# Altium PCB DUTBoard_Sandbox.PcbDoc (part 4 of 6)
Units mil, origin at the board's own origin, x right, y up, seen from the top; angles counter-clockwise.
Board outline 5475 x 5475 mil, 4 copper layers (Top Layer, Mid-Layer 1, Mid-Layer 2, Bottom Layer); 89 components, 507 nets, 1705 pads, 1204 vias.
Unrouted connection lines stored in the file: 6.
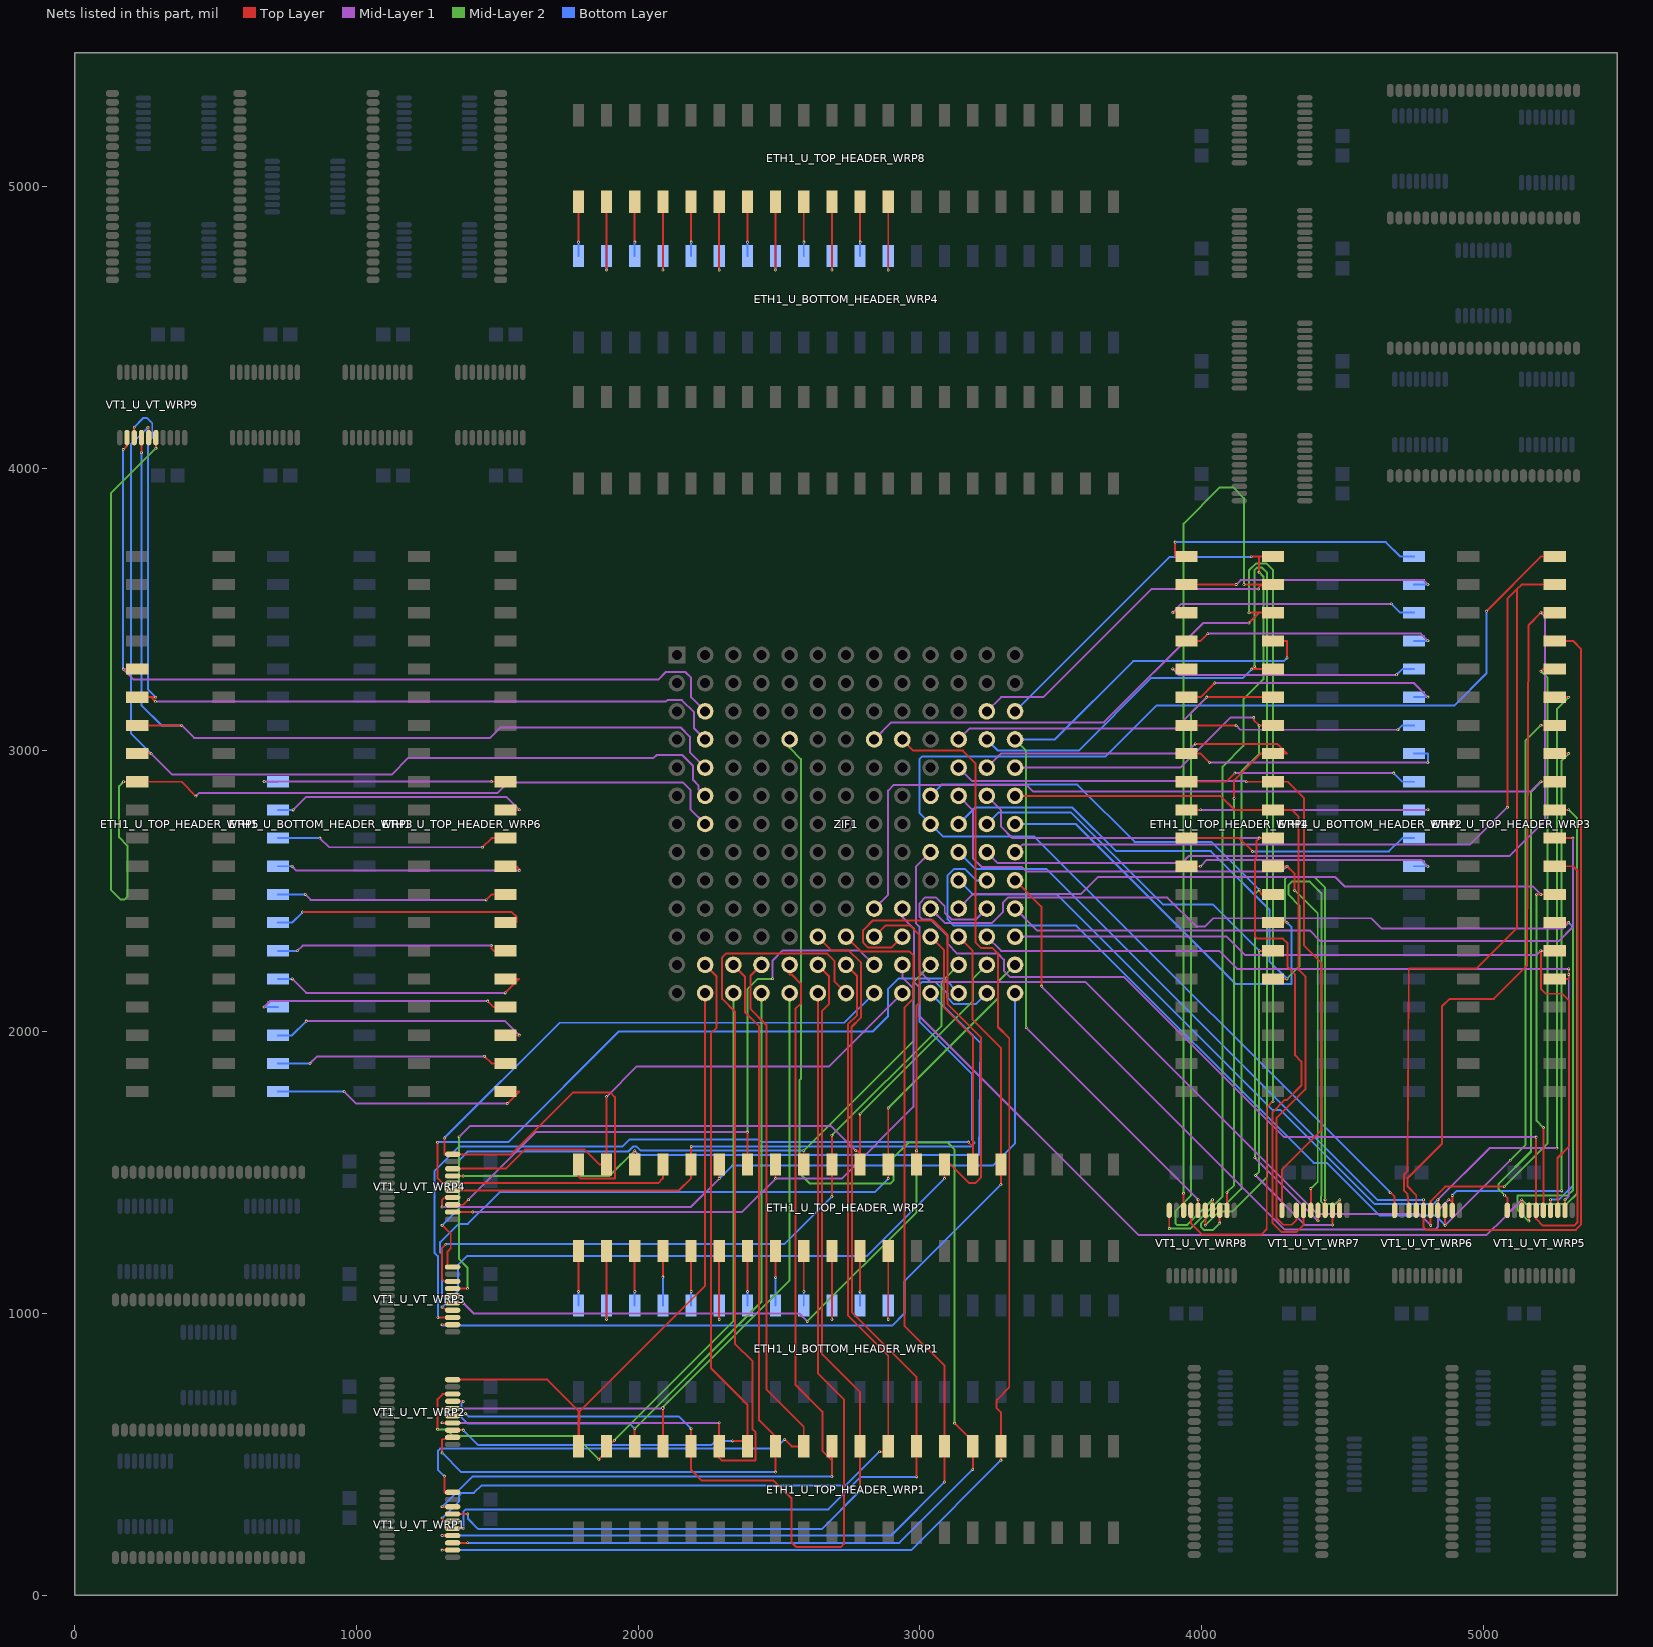
[diagram p6: the nets of this part, all layers, seen from the top]

## Via types
v1: diameter 10, hole 5, Top Layer to Bottom Layer, 1204 vias

## Nets (pads, with @x,y where several pads share a name; then routed paths per layer and width w, separated by ;. In a path a pad name is that pad's centre, name@x,y a point inside that pad or via, vN(x,y) a via of type N, cw(c..) or ccw(c..) an arc to the next point about the centre after c; other vN are vias at no path point) (continued)
INSIDE_B59: ETH1_U_TOP_HEADER_WRP5.29 VT1_U_VT_WRP9.IVCC3 ZIF1.60 | length 4382.2
  Top Layer w7: v1(173,2887.5) ETH1_U_TOP_HEADER_WRP5.29@221.46,2887.5 379,2887.5 v1(430,2836.5) ; VT1_U_VT_WRP9.IVCC3@287.8,4108.86 287.8,4071.2 v1(288,4071)
  Mid-Layer 1 w7: v1(430,2836.5) 440.25,2846.75 1499,2846.75 1537.72,2885.47 2158.53,2885.47 2185.47,2858.53 2185.47,2789.53 ZIF1.60@2237.5,2737.5
  Mid-Layer 2 w7: v1(173,2887.5) 157.5,2872 157.5,2690 187,2660.5 187,2480 177,2470 162,2470 128,2504 128,3911 v1(288,4071)
INSIDE_B60: ETH1_U_TOP_HEADER_WRP5.28 VT1_U_VT_WRP9.IVCC4 ZIF1.61 | length 3423.4
  Top Layer w7: ETH1_U_TOP_HEADER_WRP5.28@221.46,2987.5 v1(270.83,2987.5) ; v1(260,4146) 262.2,4143.8 VT1_U_VT_WRP9.IVCC4@262.2,4108.86
  Mid-Layer 1 w7: v1(270.83,2987.5) 345.33,2913 1125,2913 1184,2972 2055,2972 2065.47,2982.47 2155.53,2982.47 2194.46,2943.54 2194.46,2893.93 2213.78,2874.6 2213.78,2861.22 ZIF1.61@2237.5,2837.5
  Bottom Layer w7: v1(260,4146) 200,4086 200,3058.33 v1(270.83,2987.5)
INSIDE_B61: ETH1_U_TOP_HEADER_WRP5.27 VT1_U_VT_WRP9.IVCC5 ZIF1.62 | length 3263.6
  Top Layer w7: ETH1_U_TOP_HEADER_WRP5.27@221.46,3087.5 v1(379,3087.5) ; v1(236.61,4055) VT1_U_VT_WRP9.IVCC5@236.61,4108.86
  Mid-Layer 1 w7: v1(379,3087.5) 423.5,3043 1474,3043 1511,3080 2151,3080 2183,3048 2183,2992 ZIF1.62@2237.5,2937.5
  Bottom Layer w7: v1(236.61,4055) 236.61,3158.77 307.89,3087.5 v1(379,3087.5)
INSIDE_B62: ETH1_U_TOP_HEADER_WRP5.26 VT1_U_VT_WRP9.IVCC6 ZIF1.63 | length 3244.3
  Top Layer w7: VT1_U_VT_WRP9.IVCC6@211.02,4108.86 v1(211.02,4146) ; ETH1_U_TOP_HEADER_WRP5.26@221.46,3187.5 271,3187.5 ; v1(286.5,3172) 271,3187.5 ; v1(287,3187.5) 271,3187.5
  Mid-Layer 1 w7: v1(286.5,3172) 2098,3172 2103,3177 2155,3177 2198.5,3133.5 2198.5,3076.5 ZIF1.63@2237.5,3037.5
  Bottom Layer w7: v1(211.02,4146) 244.02,4179 256,4179 275,4160 275,4109 260,4094 260,3214.5 v1(287,3187.5)
INSIDE_B63: ETH1_U_TOP_HEADER_WRP5.25 VT1_U_VT_WRP9.IVCC7 ZIF1.64 | length 3067.8
  Top Layer w7: v1(172,3287) v1@172.5,3287.5 ; v1(172,4066.57) 185.43,4080 VT1_U_VT_WRP9.IVCC7@185.43,4108.86 ; v1(172.09,3287.5) v1@172.5,3287.5 ; ETH1_U_TOP_HEADER_WRP5.25@221.46,3287.5 v1@172.5,3287.5
  Mid-Layer 1 w7: v1(172.09,3287.5) 209.59,3250 2071,3250 2098,3277 2167,3277 2188,3256 2188,3187 ZIF1.64@2237.5,3137.5
  Bottom Layer w7: v1(172,3287) v1(172,4066.57)
INSIDE_B64: ETH1_U_TOP_HEADER_WRP4.40 VT1_U_VT_WRP8.IVCC0 ZIF1.65 | length 3782.9
  Top Layer w7: v1(3884.84,1301.5) VT1_U_VT_WRP8.IVCC0@3884.84,1366.14 ; v1(4176,3686) 4177.5,3687.5 4204,3687.5 ; v1(4204,3631) 4204,3687.5 ; ETH1_U_TOP_HEADER_WRP4.40@4253.54,3687.5 4204,3687.5
  Mid-Layer 2 w7: v1(3884.84,1301.5) 3959.5,1301.5 4074,1416 4074,2941 4148,3015 4148,3180 4219,3251 4219,3616 v1(4204,3631)
  Bottom Layer w7: ZIF1.65@3337.5,3137.5 3886,3686 v1(4176,3686)
INSIDE_B65: ETH1_U_TOP_HEADER_WRP4.39 VT1_U_VT_WRP8.IVCC1 ZIF1.66 | length 4295.2
  Top Layer w7: VT1_U_VT_WRP8.IVCC1@3936.02,1366.14 v1(3936.02,1427) ; v1(4150,3587.5) 4213,3587.5 ; v1(4201.5,3571.5) 4201.5,3576 4213,3587.5 ; ETH1_U_TOP_HEADER_WRP4.39@4253.54,3587.5 4213,3587.5
  Mid-Layer 1 w7: ZIF1.66@3237.5,3137.5 3288,3188 3438,3188 3821.5,3571.5 v1(4201.5,3571.5)
  Mid-Layer 2 w7: v1(3936.02,1427) 3936.02,3804.02 4064,3932 4112,3932 4150,3894 v1(4150,3587.5)
INSIDE_B66: ETH1_U_TOP_HEADER_WRP4.38 VT1_U_VT_WRP8.IVCC2 ZIF1.67 | length 4582.5
  Top Layer w7: VT1_U_VT_WRP8.IVCC2@3961.61,1366.14 3961.61,1320 4001.61,1280 4211,1280 4231,1300 4231,1731 v1(4253,1753) ; v1(4167.5,3451) 4204,3487.5 ; v1(4168,3487.5) 4204,3487.5 ; ETH1_U_TOP_HEADER_WRP4.38@4253.54,3487.5 4204,3487.5
  Mid-Layer 1 w7: ZIF1.67@2837.5,3037.5 2898,3098 3653,3098 4006,3451 v1(4167.5,3451)
  Mid-Layer 2 w7: v1(4168,3487.5) 4168,3638 4192,3662 4231,3662 4253,3640 v1(4253,1753)
INSIDE_B67: ETH1_U_TOP_HEADER_WRP4.37 VT1_U_VT_WRP8.IVCC3 ZIF1.68 | length 3135.8
  Top Layer w7: VT1_U_VT_WRP8.IVCC3@3987.2,1366.14 v1(3987.2,1404) ; ETH1_U_TOP_HEADER_WRP4.37@4253.54,3387.5 4303,3387.5 v1(4303,3327)
  Mid-Layer 1 w7: v1(3377,2014.2) v1(3987.2,1404)
  Mid-Layer 2 w7: ZIF1.68@3337.5,3037.5 3377,2998 v1(3377,2014.2)
  Bottom Layer w7: ZIF1.68@3337.5,3037.5 3478.5,3037.5 3757,3316 4292,3316 v1(4303,3327)
INSIDE_B68: ETH1_U_TOP_HEADER_WRP4.36 VT1_U_VT_WRP8.IVCC4 ZIF1.69 | length 4051
  Top Layer w7: v1(4012.8,1313) VT1_U_VT_WRP8.IVCC4@4012.8,1366.14 ; v1(4177.5,3287.5) 4196.5,3287.5 ; v1(4187,3297) 4196.5,3287.5 ; ETH1_U_TOP_HEADER_WRP4.36@4253.54,3287.5 4196.5,3287.5
  Mid-Layer 2 w7: v1(4012.8,1313) 4061.35,1361.55 4107.99,1361.55 4232,1485.57 4232,3629 4213,3648 4197,3648 4187,3638 v1(4187,3297)
  Bottom Layer w7: ZIF1.69@3237.5,3037.5 3277,2998 3563,2998 3820,3255 4145,3255 v1(4177.5,3287.5)
INSIDE_B69: ETH1_U_TOP_HEADER_WRP4.35 VT1_U_VT_WRP8.IVCC5 ZIF1.70 | length 3302.2
  Top Layer w7: v1(4018,3187.5) v1@4018.5,3187.5 ; v1(4018,3188) v1@4018.5,3187.5 ; VT1_U_VT_WRP8.IVCC5@4038.39,1366.14 v1(4038.39,1404) ; ETH1_U_TOP_HEADER_WRP4.35@4253.54,3187.5 v1@4018.5,3187.5
  Mid-Layer 1 w7: ZIF1.70@3137.5,3037.5 3177,3077 3907.5,3077 v1(4018,3187.5)
  Mid-Layer 2 w7: v1(4018,3188) 3962,3132 3962,1418.39 3906.5,1362.89 3906.5,1320 3912,1314.5 3948.89,1314.5 v1(4038.39,1404)
INSIDE_B70: ETH1_U_TOP_HEADER_WRP4.34 VT1_U_VT_WRP8.IVCC6 ZIF1.71 | length 3009.6
  Top Layer w7: v1(4063.98,1321) VT1_U_VT_WRP8.IVCC6@4063.98,1366.14 ; v1(4185,3115) 4185,3106.5 v1(4204,3087.5) ETH1_U_TOP_HEADER_WRP4.34@4253.54,3087.5
  Mid-Layer 1 w7: ZIF1.71@3337.5,2937.5 3924.5,2937.5 4102,3115 v1(4185,3115)
  Mid-Layer 2 w7: v1(4063.98,1321) 4038.98,1296 4008.98,1296 3998.3,1306.68 3998.3,1320 4067.5,1389.2 4088,1389.2 4141,1442.2 4141,2924 4204,2987 v1(4204,3087.5)
INSIDE_B71: ETH1_U_TOP_HEADER_WRP4.33 VT1_U_VT_WRP8.IVCC7 ZIF1.72 | length 2879.2
  Top Layer w7: v1(3977,3022) 4268.41,3022 4302.91,2987.5 ETH1_U_TOP_HEADER_WRP4.33@4253.54,2987.5 4209.37,2987.5 4115,2893.13 v1(4115,2828) ; VT1_U_VT_WRP8.IVCC7@4089.57,1366.14 v1(4089.57,1430)
  Mid-Layer 1 w7: ZIF1.72@3237.5,2937.5 3288,2988 3943,2988 v1(3977,3022)
  Mid-Layer 2 w7: v1(4089.57,1430) 4115,1455.43 v1(4115,2828)
INSIDE_B72: ETH1_U_TOP_HEADER_WRP4.32 VT1_U_VT_WRP7.IVCC0 ZIF1.73 | length 2817.9
  Top Layer w7: v1(4158.5,2887.5) ETH1_U_TOP_HEADER_WRP4.32@4253.54,2887.5 4306,2887.5 4363,2830.5 4363,2307 4425,2245 4425,1650 4284.84,1509.84 VT1_U_VT_WRP7.IVCC0@4284.84,1366.14
  Mid-Layer 1 w7: ZIF1.73@3137.5,2937.5 3185.47,2889.53 4156.47,2889.53 v1(4158.5,2887.5)
INSIDE_B73: ETH1_U_TOP_HEADER_WRP4.31 VT1_U_VT_WRP7.IVCC1 ZIF1.74 | length 2636.9
  Top Layer w7: ZIF1.74@3337.5,2837.5 4066.5,2837.5 4116.5,2787.5 ETH1_U_TOP_HEADER_WRP4.31@4253.54,2787.5 4320,2787.5 4344.5,2763 4344.5,2219.91 4367.87,2196.53 4367.87,1795.79 4265,1692.92 4265,1339 4289,1315 4320,1315 4336.02,1331.02 VT1_U_VT_WRP7.IVCC1@4336.02,1366.14
INSIDE_B74: ETH1_U_TOP_HEADER_WRP4.30 VT1_U_VT_WRP7.IVCC2 ZIF1.75 | length 2838.9
  Top Layer w7: ETH1_U_TOP_HEADER_WRP4.30@4253.54,2687.5 v1(4204.17,2687.5) 4195,2678.33 4195,2619 4189,2613 4189,2339 4197,2331 4288,2331 4305,2314 4305,2230 4332,2203 4332,1916 4354,1894 4354,1809.31 4303,1758.31 4295.31,1758.31 4252,1715 4252,1321 4284,1289 4336,1289 4361.61,1314.61 VT1_U_VT_WRP7.IVCC2@4361.61,1366.14
  Mid-Layer 1 w7: ZIF1.75@3237.5,2837.5 3288,2787 3288,2728 3328.5,2687.5 v1(4204.17,2687.5)
INSIDE_B75: ETH1_U_TOP_HEADER_WRP4.29 VT1_U_VT_WRP7.IVCC3 ZIF1.76 | length 2710.6
  Top Layer w7: ETH1_U_TOP_HEADER_WRP4.29@4253.54,2587.5 v1(4302.91,2587.5) 4330,2560.42 v1(4330,2502) ; VT1_U_VT_WRP7.IVCC3@4387.2,1366.14 v1(4387.2,1443.6)
  Mid-Layer 1 w7: ZIF1.76@3137.5,2837.5 3188,2787 3188,2616 3218.53,2585.47 3360.53,2585.47 3377,2569 4284.41,2569 v1(4302.91,2587.5)
  Mid-Layer 2 w7: v1(4330,2502) 4412,2420 4412,1468.4 v1(4387.2,1443.6)
INSIDE_B76: ETH1_U_TOP_HEADER_WRP4.28 VT1_U_VT_WRP7.IVCC4 ZIF1.77 | length 2707.4
  Top Layer w7: v1(4204.17,2503.5) 4212.67,2487.5 ETH1_U_TOP_HEADER_WRP4.28@4253.54,2487.5 ; v1(4412.8,1329) VT1_U_VT_WRP7.IVCC4@4412.8,1366.14
  Mid-Layer 1 w7: v1(4189,1552.8) v1(4412.8,1329)
  Mid-Layer 2 w7: v1(4189,1552.8) 4189,2488.33 v1(4204.17,2503.5)
  Bottom Layer w7: ZIF1.77@3037.5,2837.5 3077,2877 3559,2877 3762,2674 4033.67,2674 v1(4204.17,2503.5)
INSIDE_B77: ETH1_U_TOP_HEADER_WRP4.27 VT1_U_VT_WRP7.IVCC5 ZIF1.78 | length 2953.6
  Top Layer w7: ETH1_U_TOP_HEADER_WRP4.27@4253.54,2387.5 v1(4302.91,2387.5) ; v1(4438,1404) 4438.39,1403.61 VT1_U_VT_WRP7.IVCC5@4438.39,1366.14
  Mid-Layer 2 w7: v1(4302.91,2387.5) 4295.46,2394.95 4295.46,2541.46 4304,2550 4400,2550 4438,2512 v1(4438,1404)
  Bottom Layer w7: ZIF1.78@3337.5,2737.5 3552.5,2737.5 4120,2170 4318,2170 4318,2372.41 v1(4302.91,2387.5)
INSIDE_B78: ETH1_U_TOP_HEADER_WRP4.26 VT1_U_VT_WRP7.IVCC6 ZIF1.79 | length 2437
  Top Layer w7: v1(4204.17,2287.5) ETH1_U_TOP_HEADER_WRP4.26@4253.54,2287.5 ; v1(4463.98,1314) VT1_U_VT_WRP7.IVCC6@4463.98,1366.14
  Mid-Layer 1 w7: v1(4191,1490) 4367,1314 v1(4463.98,1314)
  Mid-Layer 2 w7: v1(4191,1490) 4204.17,1503.17 v1(4204.17,2287.5)
  Bottom Layer w7: ZIF1.79@3237.5,2737.5 3278,2778 3537,2778 3864,2451 4040.67,2451 v1(4204.17,2287.5)
INSIDE_B79: ETH1_U_TOP_HEADER_WRP4.25 VT1_U_VT_WRP7.IVCC7 ZIF1.80 | length 3315.1
  Top Layer w7: ETH1_U_TOP_HEADER_WRP4.25@4253.54,2187.5 v1(4302.5,2187.5) v1(4302.91,2187.5) ; VT1_U_VT_WRP7.IVCC7@4489.57,1366.14 4489.57,1403.57 v1(4490,1404)
  Mid-Layer 2 w7: v1(4302.5,2187.5) 4347,2232 4347,2448 4308.46,2486.54 4308.46,2521.46 4320,2533 4384,2533 4425,2492 4425,1417 4423,1415 4423,1398 4432,1389 4475,1389 v1(4490,1404)
  Bottom Layer w7: ZIF1.80@3137.5,2737.5 3196,2796 3541,2796 3696,2641 4033,2641 4240,2434 4240,2250.41 v1(4302.91,2187.5)
INSIDE_B80: ETH1_U_TOP_HEADER_WRP3.40 VT1_U_VT_WRP6.IVCC0 ZIF1.81 | length 5173.3
  Top Layer w7: v1(4668.84,1430) 4684.84,1414 VT1_U_VT_WRP6.IVCC0@4684.84,1366.14 ; v1(5011,3493) 5205.5,3687.5 ETH1_U_TOP_HEADER_WRP3.40@5253.54,3687.5
  Bottom Layer w7: v1(4668.84,1430) 3406.34,2692.5 3082.5,2692.5 ZIF1.81@3037.5,2737.5 2998,2777 2998,2968 3007,2977 3658.17,2977 3839.17,3158 4897,3158 5011,3272 v1(5011,3493)
INSIDE_B81: ETH1_U_TOP_HEADER_WRP3.39 VT1_U_VT_WRP6.IVCC1 ZIF1.82 | length 5258
  Top Layer w7: VT1_U_VT_WRP6.IVCC1@4736.02,1366.14 4730,1425 4717.5,1437.5 4717.5,1492.5 4730,1505 4735,2225 4976,2225 5119,2368 5119,3570.5 ; v1(5085,2797) 5085,3536.5 5119,3570.5 ; ETH1_U_TOP_HEADER_WRP3.39@5253.54,3587.5 5136,3587.5 5119,3570.5
  Mid-Layer 1 w7: ZIF1.82@3337.5,2637.5 3365,2665 4953,2665 v1(5085,2797)
INSIDE_B82: ETH1_U_TOP_HEADER_WRP3.38 VT1_U_VT_WRP6.IVCC2 ZIF1.83 | length 5273.4
  Top Layer w7: VT1_U_VT_WRP6.IVCC2@4761.61,1366.14 4761.61,1419.89 4730.5,1451 4730.5,1479.5 4853,1602 4853,2090 4880,2117 5037,2117 5154,2234 5159.99,3443.31 v1(5204.17,3487.5) ETH1_U_TOP_HEADER_WRP3.38@5253.54,3487.5
  Mid-Layer 1 w7: ZIF1.83@3237.5,2637.5 3276.53,2598.47 3929.47,2598.47 3955,2624 5093,2624 5219,2750 5219,3472.67 v1(5204.17,3487.5)
INSIDE_B83: ETH1_U_TOP_HEADER_WRP3.37 VT1_U_VT_WRP6.IVCC3 ZIF1.84 | length 4977
  Top Layer w7: v1(4787.2,1403.7) VT1_U_VT_WRP6.IVCC3@4787.2,1366.14 4787.2,1306.98 4796.99,1297.19 5328,1297.19 5347.01,1316.2 5347.01,3358.49 5318,3387.5 ETH1_U_TOP_HEADER_WRP3.37@5253.54,3387.5
  Bottom Layer w7: ZIF1.84@3137.5,2637.5 3198,2577 3450,2577 4623.3,1403.7 v1(4787.2,1403.7)
INSIDE_B84: ETH1_U_TOP_HEADER_WRP3.36 VT1_U_VT_WRP6.IVCC4 ZIF1.85 | length 4962.2
  Top Layer w7: v1(4812.8,1312.58) VT1_U_VT_WRP6.IVCC4@4812.8,1366.14 4812.8,1398.8 4864,1450 v1(5074,1450) ; v1(5204,3280) 5211.5,3287.5 ETH1_U_TOP_HEADER_WRP3.36@5253.54,3287.5
  Mid-Layer 1 w7: ZIF1.85@3037.5,2637.5 2985.47,2585.47 2985.47,2385.47 2998,2372.94 2998,2216 3037,2177 3587,2177 4410,1354 4771.38,1354 v1(4812.8,1312.58)
  Mid-Layer 2 w7: v1(5074,1450) 5228,1604 5228,3256 v1(5204,3280)
INSIDE_B85: ETH1_U_TOP_HEADER_WRP3.35 VT1_U_VT_WRP6.IVCC5 ZIF1.86 | length 4386.2
  Top Layer w7: VT1_U_VT_WRP6.IVCC5@4838.39,1366.14 v1(4838.39,1403.7) ; ETH1_U_TOP_HEADER_WRP3.35@5253.54,3187.5 v1(5303,3187.5)
  Mid-Layer 1 w7: v1(4838.39,1403.7) 5021.69,1587 v1(5261,1587)
  Mid-Layer 2 w7: v1(5261,1587) 5261,3145.5 v1(5303,3187.5)
  Bottom Layer w7: ZIF1.86@3137.5,2537.5 3187,2488 3485.27,2488 4251.68,1721.59 4280.41,1721.59 4613,1389 4823.69,1389 v1(4838.39,1403.7)
INSIDE_B86: ETH1_U_TOP_HEADER_WRP3.34 VT1_U_VT_WRP6.IVCC6 ZIF1.87 | length 4555.5
  Top Layer w7: v1(4864,1313) VT1_U_VT_WRP6.IVCC6@4863.98,1366.14 ; v1(5204,3088) 5204.5,3087.5 ETH1_U_TOP_HEADER_WRP3.34@5253.54,3087.5
  Mid-Layer 1 w7: v1(4864,1313) v1(5095,1544)
  Mid-Layer 2 w7: v1(5095,1544) 5149,1598 5149,3033 v1(5204,3088)
  Bottom Layer w7: ZIF1.87@3237.5,2537.5 3199.5,2537.5 3160,2577 3120,2577 3098,2555 3098,2399 3120,2377 3555,2377 4397,1535 4444,1535 4631,1348 4829,1348 v1(4864,1313)
INSIDE_B87: ETH1_U_TOP_HEADER_WRP3.33 VT1_U_VT_WRP6.IVCC7 ZIF1.88 | length 4372.7
  Top Layer w7: ZIF1.88@3337.5,2537.5 3431,2444 v1(3431,2162) ; v1(4877,1404) 4880,1404 4889.57,1394.43 ; VT1_U_VT_WRP6.IVCC7@4889.57,1366.14 4889.57,1394.43 ; v1(4889.57,1419) 4889.57,1394.43 ; ETH1_U_TOP_HEADER_WRP3.33@5253.54,2987.5 v1(5303,2987.5)
  Mid-Layer 1 w7: v1(3431,2162) 4295,1298 4828.91,1298 4838,1307.09 4838,1365 v1(4877,1404)
  Mid-Layer 2 w7: v1(5278,1435) 5278,2962.5 v1(5303,2987.5)
  Bottom Layer w7: v1(4889.57,1419) 4905.57,1435 v1(5278,1435)
INSIDE_B88: ETH1_U_TOP_HEADER_WRP3.32 VT1_U_VT_WRP5.IVCC0 ZIF1.89 | length 4434.1
  Top Layer w7: v1(5075,1420) 5084.84,1410.16 VT1_U_VT_WRP5.IVCC0@5084.84,1366.14 ; v1(5204.17,2887.5) ETH1_U_TOP_HEADER_WRP3.32@5253.54,2887.5
  Mid-Layer 1 w7: ZIF1.89@2837.5,2437.5 2887,2487 2887,2856 2907.53,2876.53 3377,2876.53 3400.53,2853 5169.67,2853 v1(5204.17,2887.5)
  Mid-Layer 2 w7: v1(5075,1420) 5054.4,1440.6 5054.4,1460.4 5169,1575 5169,2852.33 v1(5204.17,2887.5)
INSIDE_B89: ETH1_U_TOP_HEADER_WRP3.31 VT1_U_VT_WRP5.IVCC1 ZIF1.90 | length 4598.1
  Top Layer w7: VT1_U_VT_WRP5.IVCC1@5136.02,1366.14 v1(5136.02,1403.7) ; ETH1_U_TOP_HEADER_WRP3.31@5253.54,2787.5 5302.5,2787.5 v1(5303,2788)
  Mid-Layer 1 w7: ZIF1.90@2937.5,2437.5 2937.5,2407.44 2978.58,2366.37 2978.58,2177.86 2998,2158.44 2998,2056 3775,1279 5011.32,1279 5072,1338.01 5096.18,1363.86 v1(5136.02,1403.7)
  Mid-Layer 2 w7: v1(5136.02,1403.7) 5150.73,1389 5296,1389 5333,1426 5333,2758 v1(5303,2788)
INSIDE_B90: ETH1_U_TOP_HEADER_WRP3.30 VT1_U_VT_WRP5.IVCC2 ZIF1.91 | length 4029.3
  Top Layer w7: v1(5161.61,1328) VT1_U_VT_WRP5.IVCC2@5161.61,1366.14 ; ETH1_U_TOP_HEADER_WRP3.30@5253.54,2687.5 v1(5318,2687.5)
  Mid-Layer 1 w7: ZIF1.91@3337.5,2437.5 3415,2360 4383,2360 4421,2322 5268,2322 5318,2372 v1(5318,2687.5)
  Mid-Layer 2 w7: v1(5161.61,1328) 5121,1368.61 5121,1419 5299,1419 5318,1438 v1(5318,2687.5)
INSIDE_B91: ETH1_U_TOP_HEADER_WRP3.29 VT1_U_VT_WRP5.IVCC3 ZIF1.92 | length 4695.6
  Top Layer w7: v1(5187.2,1626) VT1_U_VT_WRP5.IVCC3@5187.2,1366.14 5187.2,1336 5211.2,1312 5321.66,1312 5334.01,1324.35 5334.01,2572.49 5319,2587.5 ETH1_U_TOP_HEADER_WRP3.29@5253.54,2587.5
  Mid-Layer 1 w7: ZIF1.92@3237.5,2437.5 3198.47,2398.47 3112.53,2398.47 3088,2423 3088,2445 3056,2477 3019.47,2477 2998.47,2456 2998.47,2408 3008,2398.47 3038,2398.47 3098,2338.47 3098,2312 3133,2277 3277,2277 3298,2256 3298,2216 3319,2195 3724,2195 4293,1626 v1(5187.2,1626)
INSIDE_B92: ETH1_U_TOP_HEADER_WRP3.28 VT1_U_VT_WRP5.IVCC4 ZIF1.93 | length 3334.7
  Top Layer w7: v1(5189,2487.5) v1(5204.17,2487.5) ETH1_U_TOP_HEADER_WRP3.28@5253.54,2487.5 ; VT1_U_VT_WRP5.IVCC4@5212.8,1366.14 v1(5212.8,1660)
  Mid-Layer 1 w7: ZIF1.93@3137.5,2437.5 3189.53,2489.53 3572.53,2489.53 3632.75,2549.75 4473.25,2549.75 4507,2516 5175.67,2516 v1(5204.17,2487.5)
  Mid-Layer 2 w7: v1(5189,2487.5) 5189,1683.8 v1(5212.8,1660)
INSIDE_B93: ETH1_U_TOP_HEADER_WRP3.27 VT1_U_VT_WRP5.IVCC5 ZIF1.94 | length 3551.7
  Top Layer w7: v1(5238,1404) 5238.39,1403.61 VT1_U_VT_WRP5.IVCC5@5238.39,1366.14 ; ETH1_U_TOP_HEADER_WRP3.27@5253.54,2387.5 v1(5302.91,2387.5)
  Mid-Layer 1 w7: ZIF1.94@3037.5,2437.5 3089.53,2385.47 3254.47,2385.47 3295.24,2426.24 3295.24,2459.77 3312,2476.53 3878.47,2476.53 3982,2373 4011,2373 4041,2403 4602,2403 4639,2366 5281.41,2366 v1(5302.91,2387.5)
  Bottom Layer w7: v1(5238,1404) 5268,1404 5318,1454 5318,2372.41 v1(5302.91,2387.5)
INSIDE_B94: ETH1_U_TOP_HEADER_WRP3.26 VT1_U_VT_WRP5.IVCC6 ZIF1.95 | length 2962.8
  Top Layer w7: ETH1_U_TOP_HEADER_WRP3.26@5253.54,2287.5 v1(5204.17,2287.5) 5204,2287.5 5204,2152 5221,2135 5280,2135 5303,2112 5303,1592 5263,1552 5263,1405.98 5263.98,1405 VT1_U_VT_WRP5.IVCC6@5263.98,1366.14
  Mid-Layer 1 w7: ZIF1.95@3337.5,2337.5 4088.5,2337.5 4153,2273 5189.67,2273 v1(5204.17,2287.5)
INSIDE_B95: ETH1_U_TOP_HEADER_WRP3.25 VT1_U_VT_WRP5.IVCC7 ZIF1.96 | length 3040.6
  Top Layer w7: ETH1_U_TOP_HEADER_WRP3.25@5253.54,2187.5 5302.91,2187.5 v1(5302.91,2203.5) v1(5302.91,2223) ; VT1_U_VT_WRP5.IVCC7@5289.57,1366.14 v1(5289.57,1403.57)
  Mid-Layer 1 w7: ZIF1.96@3237.5,2337.5 3288,2287 4062,2287 4126,2223 v1(5302.91,2223) ; v1(5289.57,1403.57) 5302.91,1416.91 v1(5302.91,2203.5)
INSIDE_B96: ETH1_U_TOP_HEADER_WRP2.40 VT1_U_VT_WRP4.IVCC0 ZIF1.97 | length 2962.3
  Top Layer w7: v1(1312,1623) 1312,1565.16 VT1_U_VT_WRP4.IVCC0@1341.14,1565.16 1550,1565.16 1769.84,1785 1900,1785 1917,1768 1917,1479 1796.5,1479 1787.5,1488 ETH1_U_TOP_HEADER_WRP2.40@1787.5,1528.54
  Bottom Layer w7: v1(1312,1623) 1721,2032 2732,2032 ZIF1.97@2837.5,2137.5
INSIDE_B97: ETH1_U_TOP_HEADER_WRP2.39 VT1_U_VT_WRP4.IVCC1 ZIF1.98 | length 2040.4
  Top Layer w7: VT1_U_VT_WRP4.IVCC1@1341.14,1513.98 1530,1513.98 1598.02,1582 1810,1582 1863.46,1528.54 ETH1_U_TOP_HEADER_WRP2.39@1887.5,1528.54 v1(1887.5,1770)
  Mid-Layer 1 w7: v1(1887.5,1770) 1993.5,1876 2676,1876 ZIF1.98@2937.5,2137.5
INSIDE_B98: ETH1_U_TOP_HEADER_WRP2.38 VT1_U_VT_WRP4.IVCC2 ZIF1.99 | length 2611.3
  Top Layer w7: VT1_U_VT_WRP4.IVCC2@1341.14,1488.39 1378.61,1488.39 v1(1379,1488) ; ETH1_U_TOP_HEADER_WRP2.38@1987.5,1528.54 v1(1987.5,1577.91)
  Mid-Layer 2 w7: v1(1379,1488) 1897.59,1488 v1(1987.5,1577.91)
  Bottom Layer w7: v1(1987.5,1577.91) 2003.41,1562 3210,1562 3215,1960 ZIF1.99@3037.5,2137.5
INSIDE_B99: ETH1_U_TOP_HEADER_WRP2.37 VT1_U_VT_WRP4.IVCC3 ZIF1.100 | length 3158.5
  Top Layer w7: v1(1288,1608) 1288,1480 1305.2,1462.8 VT1_U_VT_WRP4.IVCC3@1341.14,1462.8 2070.3,1462.8 2087.5,1480 ETH1_U_TOP_HEADER_WRP2.37@2087.5,1528.54
  Bottom Layer w7: v1(1288,1608) 1538,1608 1931,2001 2832,2001 2887,2056 2887,2152 2924.53,2189.53 3085.47,2189.53 ZIF1.100@3137.5,2137.5
INSIDE_B100: ETH1_U_TOP_HEADER_WRP2.36 VT1_U_VT_WRP4.IVCC4 ZIF1.101 | length 2932.3
  Top Layer w7: VT1_U_VT_WRP4.IVCC4@1341.14,1437.2 2144.7,1437.2 2187.5,1480 ETH1_U_TOP_HEADER_WRP2.36@2187.5,1528.54 2187.5,1592.5 v1(2188,1593)
  Bottom Layer w7: v1(2188,1593) 3181.5,1593 3194.5,1606 3185,1615.5 3185,1849 2998.47,2035.53 2998.47,2168 3007,2176.53 3056,2176.53 3098,2134.53 3098,2120 3120,2098 3198,2098 ZIF1.101@3237.5,2137.5
INSIDE_B101: ETH1_U_TOP_HEADER_WRP2.35 VT1_U_VT_WRP4.IVCC5 ZIF1.102 | length 2776.4
  Top Layer w7: v1(1304,1378) 1304,1403.61 1312,1411.61 VT1_U_VT_WRP4.IVCC5@1341.14,1411.61 ; v1(2287.5,1479) v1(2287.5,1479.17) ETH1_U_TOP_HEADER_WRP2.35@2287.5,1528.54
  Mid-Layer 1 w7: v1(1304,1378) 2186.5,1378 v1(2287.5,1479)
  Bottom Layer w7: v1(2287.5,1479.17) 2333.33,1525 3259,1525 3337.5,1603.5 ZIF1.102@3337.5,2137.5
INSIDE_B102: ETH1_U_TOP_HEADER_WRP2.34 VT1_U_VT_WRP4.IVCC6 ZIF1.103 | length 2341.7
  Top Layer w7: VT1_U_VT_WRP4.IVCC6@1341.14,1386.02 1379.02,1386.02 v1(1397,1404) ; ETH1_U_TOP_HEADER_WRP2.34@2387.5,1528.54 v1(2387.5,1644)
  Mid-Layer 1 w7: v1(1397,1404) 1637,1644 v1(2387.5,1644) ; v1(2477,2188) 2477,2253 2512,2288 2787,2288 ZIF1.103@2837.5,2237.5
  Mid-Layer 2 w7: v1(2387.5,1644) 2387.5,2151.5 2424,2188 v1(2477,2188)
INSIDE_B103: ETH1_U_TOP_HEADER_WRP2.33 VT1_U_VT_WRP4.IVCC7 ZIF1.104 | length 2359.6
  Top Layer w7: VT1_U_VT_WRP4.IVCC7@1341.14,1360.43 v1(1412.91,1360.43) ; v1(2487.5,1479) ETH1_U_TOP_HEADER_WRP2.33@2487.5,1528.54
  Mid-Layer 1 w7: v1(1412.91,1360.43) 2368.93,1360.43 v1(2487.5,1479) 2722,1479 2976.53,1733.53 2976.53,2154.05 2937.5,2193.08 ZIF1.104@2937.5,2237.5
INSIDE_B104: ETH1_U_TOP_HEADER_WRP2.32 VT1_U_VT_WRP3.IVCC0 ZIF1.105 | length 2584.1
  Top Layer w7: v1(1304,1313) 1334.5,1282.5 1334.5,1231.5 1323,1220 1323,1165.16 VT1_U_VT_WRP3.IVCC0@1341.14,1165.16 ; ETH1_U_TOP_HEADER_WRP2.32@2587.5,1528.54 v1(2587.5,1578)
  Mid-Layer 2 w7: v1(2587.5,1578) 2977.59,1968.09 2977.59,2177.59 ZIF1.105@3037.5,2237.5
  Bottom Layer w7: v1(1304,1313) 1364,1373 1364,1544 1395,1575 1964,1575 1981.42,1592.42 1994.58,1592.42 2009,1578 v1(2587.5,1578)
INSIDE_B105: ETH1_U_TOP_HEADER_WRP2.31 VT1_U_VT_WRP3.IVCC1 ZIF1.106 | length 2619.3
  Top Layer w7: v1(1317,1246) 1304,1233 1304,1121.98 1312,1113.98 VT1_U_VT_WRP3.IVCC1@1341.14,1113.98 ; v1(2687.5,1415) ETH1_U_TOP_HEADER_WRP2.31@2687.5,1528.54 v1(2687.5,1632.5)
  Mid-Layer 2 w7: v1(2687.5,1632.5) 3077,2022 3077,2177 ZIF1.106@3137.5,2237.5
  Bottom Layer w7: v1(1317,1246) 2518.5,1246 v1(2687.5,1415)
INSIDE_B106: ETH1_U_TOP_HEADER_WRP2.30 VT1_U_VT_WRP3.IVCC2 ZIF1.107 | length 2978.7
  Top Layer w7: VT1_U_VT_WRP3.IVCC2@1341.14,1088.39 v1(1394,1088.39) ; v1(2772,1578) 2777.5,1578 2787.5,1568 ; ETH1_U_TOP_HEADER_WRP2.30@2787.5,1528.54 2787.5,1568 ; v1(2787.5,1708.5) 2787.5,1568
  Mid-Layer 1 w7: v1(1364,1627) 1402,1665 2685,1665 v1(2772,1578)
  Mid-Layer 2 w7: v1(1364,1627) 1364,1193 1394,1163 v1(1394,1088.39) ; v1(2787.5,1708.5) 3188,2109 3188,2188 ZIF1.107@3237.5,2237.5
INSIDE_B107: ETH1_U_TOP_HEADER_WRP2.29 VT1_U_VT_WRP3.IVCC3 ZIF1.108 | length 2859
  Top Layer w7: v1(1304.2,1063) 1304.41,1062.8 VT1_U_VT_WRP3.IVCC3@1341.14,1062.8 ; v1(2887.5,1479) ETH1_U_TOP_HEADER_WRP2.29@2887.5,1528.54 v1(2887.5,1729.5)
  Mid-Layer 2 w7: v1(2887.5,1729.5) 3277,2119 3277,2177 ZIF1.108@3337.5,2237.5
  Bottom Layer w7: v1(1304.2,1063) 1304.2,1209.8 1297,1217 1297,1253 1362.23,1318.23 1395.31,1318.23 1508.08,1431 2839.5,1431 v1(2887.5,1479)
INSIDE_B108: ETH1_U_TOP_HEADER_WRP2.28 VT1_U_VT_WRP3.IVCC4 ZIF1.109 | length 3063.6
  Top Layer w7: VT1_U_VT_WRP3.IVCC4@1341.14,1037.2 v1(1379,1037.2) ; ZIF1.109@2837.5,2337.5 2877,2377 2965,2377 2998,2344 2998,2103 2987.5,2092.5 v1@2987.5,1577.5 ; ETH1_U_TOP_HEADER_WRP2.28@2987.5,1528.54 v1@2987.5,1577.5 ; v1(2988,1578) v1@2987.5,1577.5
  Mid-Layer 1 w7: v1(1379,1037.2) 1416.2,1000 2572,1000 v1(2600,972)
  Mid-Layer 2 w7: v1(2600,972) 2988,1360 v1(2988,1578)
INSIDE_B109: ETH1_U_TOP_HEADER_WRP2.27 VT1_U_VT_WRP3.IVCC5 ZIF1.110 | length 3734.4
  Top Layer w7: v1(1304,1023) 1304,1019.61 VT1_U_VT_WRP3.IVCC5@1341.14,1011.61 ; ZIF1.110@2937.5,2337.5 2898.47,2298.47 2816,2298.47 2798,2316.47 2798,2361 2832,2395 3047,2395 3098.47,2343.53 3098.47,2098 3217,1979.47 3217,1483 3198,1464 3174,1464 3109.46,1528.54 ETH1_U_TOP_HEADER_WRP2.27@3087.5,1528.54 3087.5,1479.5 v1(3087,1479)
  Bottom Layer w7: v1(1304,1023) 1360,1079 1360,1171.49 1392,1203.49 2811.49,1203.49 v1(3087,1479)
INSIDE_B110: ETH1_U_TOP_HEADER_WRP2.26 VT1_U_VT_WRP3.IVCC6 ZIF1.111 | length 3415.7
  Top Layer w7: v1(1289,986.02) VT1_U_VT_WRP3.IVCC6@1341.14,986.02 ; ZIF1.111@3037.5,2337.5 3085.47,2289.53 3085.47,2085.47 3187.5,1983.44 3187.5,1593 ; v1(3172.08,1608.42) 3187.5,1593 ; ETH1_U_TOP_HEADER_WRP2.26@3187.5,1528.54 3187.5,1593
  Bottom Layer w7: v1(1289,986.02) 1289,1204 1276.5,1216.5 1276.5,1504.63 1364.87,1593 1944.48,1593 1969.89,1618.42 2428,1618.42 2438,1608.42 v1(3172.08,1608.42)
INSIDE_B111: ETH1_U_TOP_HEADER_WRP2.25 VT1_U_VT_WRP3.IVCC7 ZIF1.112 | length 3238.9
  Top Layer w7: v1(1304,960) 1304.43,960.43 VT1_U_VT_WRP3.IVCC7@1341.14,960.43 ; ZIF1.112@3137.5,2337.5 3187,2288 3187,2043 3287.5,1942.5 ETH1_U_TOP_HEADER_WRP2.25@3287.5,1528.54 v1(3287.5,1457.5)
  Bottom Layer w7: v1(1304,960) 1307,957 2902,957 2945,1000 2945,1115 v1(3287.5,1457.5)
INSIDE_B112: ETH1_U_TOP_HEADER_WRP1.40 VT1_U_VT_WRP2.IVCC0 ZIF1.113 | length 2415.3
  Top Layer w7: VT1_U_VT_WRP2.IVCC0@1341.14,765.16 1677.34,765.16 1791,651.5 ; ZIF1.113@2237.5,2137.5 2237.5,1098 1791,651.5 ; 1791,651.5 1787.5,648 ETH1_U_TOP_HEADER_WRP1.40@1787.5,528.54 1791,651.5
INSIDE_B113: ETH1_U_TOP_HEADER_WRP1.39 VT1_U_VT_WRP2.IVCC1 ZIF1.114 | length 2642
  Top Layer w7: v1(1288,589) 1288,696 1305.98,713.98 VT1_U_VT_WRP2.IVCC1@1341.14,713.98 ; v1(1860.5,482) 1887.5,509 ETH1_U_TOP_HEADER_WRP1.39@1887.5,528.54 1894.04,528.54 v1(1915.5,550)
  Mid-Layer 2 w7: v1(1288,589) 1318,589 1341,566 1776.5,566 v1(1860.5,482) ; v1(1915.5,550) 2338,972.5 2338,2137.5 ZIF1.114@2337.5,2137.5
INSIDE_B114: ETH1_U_TOP_HEADER_WRP1.38 VT1_U_VT_WRP2.IVCC2 ZIF1.115 | length 2524.8
  Top Layer w7: VT1_U_VT_WRP2.IVCC2@1341.14,688.39 1378.61,688.39 v1(1379,688) ; ETH1_U_TOP_HEADER_WRP1.38@1987.5,528.54 v1(1987.5,591)
  Mid-Layer 2 w7: v1(1987.5,591) 2437.5,1041 ZIF1.115@2437.5,2137.5
  Bottom Layer w7: v1(1379,688) 1372,681 1372,632 1395,609 1969.5,609 v1(1987.5,591)
INSIDE_B115: ETH1_U_TOP_HEADER_WRP1.37 VT1_U_VT_WRP2.IVCC3 ZIF1.116 | length 2615.6
  Top Layer w7: v1(1304.2,662.8) VT1_U_VT_WRP2.IVCC3@1341.14,662.8 ; ETH1_U_TOP_HEADER_WRP1.37@2087.5,528.54 v1(2087.5,662.8) v1(2087.5,667.5)
  Mid-Layer 1 w7: v1(1304.2,662.8) v1(2087.5,662.8)
  Mid-Layer 2 w7: v1(2087.5,667.5) 2537.5,1117.5 ZIF1.116@2537.5,2137.5
INSIDE_B116: ETH1_U_TOP_HEADER_WRP1.36 VT1_U_VT_WRP2.IVCC4 ZIF1.117 | length 3763.3
  Top Layer w7: VT1_U_VT_WRP2.IVCC4@1341.14,637.2 1379,637.2 v1(1386.9,645.1) ; v1(2187.5,591) ETH1_U_TOP_HEADER_WRP1.36@2187.5,528.54 2187.5,444.5 2224,408 2480,408 2544,344 2544,188 2560,172 2720,172 2730,182 2730,695 2637.5,787.5 ZIF1.117@2637.5,2137.5
  Bottom Layer w7: v1(1386.9,645.1) 1397,635 2143.5,635 v1(2187.5,591)
INSIDE_B117: ETH1_U_TOP_HEADER_WRP1.35 VT1_U_VT_WRP2.IVCC5 ZIF1.118 | length 3658
  Top Layer w7: v1(1304,612) 1304.39,611.61 VT1_U_VT_WRP2.IVCC5@1341.14,611.61 ; v1(2287.5,612) ETH1_U_TOP_HEADER_WRP1.35@2287.5,528.54 2287.5,487.5 2296,479 2417,479 2417,578 2406,589 2406,830 2343,893 2343,2072 2298,2117 2298,2264 2311,2277 2671,2277 2696,2252 2696,2179 ZIF1.118@2737.5,2137.5
  Mid-Layer 1 w7: v1(1304,612) v1(2287.5,612)
INSIDE_B118: ETH1_U_TOP_HEADER_WRP1.34 VT1_U_VT_WRP2.IVCC6 ZIF1.119 | length 2861.4
  Top Layer w7: VT1_U_VT_WRP2.IVCC6@1341.14,586.02 v1(1379,586.02) ; ZIF1.119@2237.5,2237.5 2277,2198 2277,2013 2258,1994 2258,806.5 2387.5,677 ETH1_U_TOP_HEADER_WRP1.34@2387.5,548 ; v1(2335,548) ETH1_U_TOP_HEADER_WRP1.34@2387.5,548 ; ETH1_U_TOP_HEADER_WRP1.34@2387.5,528.54 ETH1_U_TOP_HEADER_WRP1.34@2387.5,548
  Bottom Layer w7: v1(1379,586.02) 1432.02,533 2260,533 2275,548 v1(2335,548)
INSIDE_B119: ETH1_U_TOP_HEADER_WRP1.33 VT1_U_VT_WRP2.IVCC7 ZIF1.120 | length 3159.7
  Top Layer w7: v1(1304,505) 1304,552.43 VT1_U_VT_WRP2.IVCC7@1341.14,560.43 ; ZIF1.120@2337.5,2237.5 2379,2196 2379,2070 2429,2020 2429,620.5 2487.5,562 ETH1_U_TOP_HEADER_WRP1.33@2487.5,528.54 v1(2487.5,437)
  Bottom Layer w7: v1(1304,505) 1372,437 v1(2487.5,437)
INSIDE_B120: ETH1_U_TOP_HEADER_WRP1.32 VT1_U_VT_WRP1.IVCC0 ZIF1.121 | length 3314.9
  Top Layer w7: v1(1312,423) 1312,365.16 VT1_U_VT_WRP1.IVCC0@1341.14,365.16 ; ZIF1.121@2437.5,2237.5 2398,2198 2398,2081 2455,2024 2455,730.5 2587.5,598 ETH1_U_TOP_HEADER_WRP1.32@2587.5,528.54 2544.46,528.54 v1(2520,553)
  Bottom Layer w7: v1(1312,423) 1289,446 1289,512 1297,520 2487,520 v1(2520,553)
INSIDE_B121: ETH1_U_TOP_HEADER_WRP1.31 VT1_U_VT_WRP1.IVCC1 ZIF1.122 | length 3412.5
  Top Layer w7: v1(1304,313.98) VT1_U_VT_WRP1.IVCC1@1341.14,313.98 ; ZIF1.122@2537.5,2237.5 2537.5,2204 2544,2204 2577,2171 2577,2100 2558,2081 2558,748 2654,652 2654,512.67 2687.5,479.17 ; v1(2687.5,421) 2687.5,479.17 ; ETH1_U_TOP_HEADER_WRP1.31@2687.5,528.54 2687.5,479.17
  Bottom Layer w7: v1(1304,313.98) 1411.02,421 v1(2687.5,421)
INSIDE_B122: ETH1_U_TOP_HEADER_WRP1.30 VT1_U_VT_WRP1.IVCC2 ZIF1.123 | length 3483.8
  Top Layer w7: VT1_U_VT_WRP1.IVCC2@1341.14,288.39 v1(1395,288.39) ; ZIF1.123@2637.5,2237.5 2677,2198 2677,2098 2652.03,2073.03 2652.03,856.47 2787.5,721 ETH1_U_TOP_HEADER_WRP1.30@2787.5,528.54 2787.5,370.5 v1(2787,370)
  Bottom Layer w7: v1(1395,288.39) 1395,272.39 1432.39,235 2652,235 v1(2787,370)
INSIDE_B123: ETH1_U_TOP_HEADER_WRP1.29 VT1_U_VT_WRP1.IVCC3 ZIF1.124 | length 3554.1
  Top Layer w7: v1(1304,274) 1304,270.8 1312,262.8 VT1_U_VT_WRP1.IVCC3@1341.14,262.8 ; ZIF1.124@2737.5,2237.5 2777,2198 2777,2059 2744,2026 2744,994 2887.5,850.5 ETH1_U_TOP_HEADER_WRP1.29@2887.5,528.54 2887.5,509 v1(2856,509)
  Bottom Layer w7: v1(1304,274) 1364.2,334.2 1364.2,354 1373.2,363 1417,363 1444,390 2737,390 v1(2856,509)
INSIDE_B124: ETH1_U_TOP_HEADER_WRP1.28 VT1_U_VT_WRP1.IVCC4 ZIF1.125 | length 3882.1
  Top Layer w7: VT1_U_VT_WRP1.IVCC4@1341.14,237.2 v1(1379,237.2) ; ZIF1.125@2637.5,2337.5 2687,2288 2748,2288 2790,2246 2790,2050 2757,2017 2757,1563.41 2758.31,1562.1 2758.31,1004.69 2987.5,775.5 ETH1_U_TOP_HEADER_WRP1.28@2987.5,528.54 v1(2987.5,420)
  Bottom Layer w7: v1(1379,237.2) 1379,296 1388,305 2675,305 2790,420 v1(2987.5,420)
INSIDE_B125: ETH1_U_TOP_HEADER_WRP1.27 VT1_U_VT_WRP1.IVCC5 ZIF1.126 | length 4107.4
  Top Layer w7: v1(1304,212) 1304.39,211.61 VT1_U_VT_WRP1.IVCC5@1341.14,211.61 ; ZIF1.126@2737.5,2337.5 2789.53,2285.47 2962.53,2285.47 2976.53,2271.47 2976.53,2117.53 2945,2086 2945,957 3087.5,814.5 ETH1_U_TOP_HEADER_WRP1.27@3087.5,528.54 v1(3087.5,402)
  Bottom Layer w7: v1(1304,212) 2897.5,212 v1(3087.5,402)
INSIDE_B126: ETH1_U_TOP_HEADER_WRP1.26 VT1_U_VT_WRP1.IVCC6 ZIF1.127 | length 5357.4
  Top Layer w7: VT1_U_VT_WRP1.IVCC6@1341.14,186.02 v1(1395,186) ; v1(3123,610.5) 3187.5,546 ETH1_U_TOP_HEADER_WRP1.26@3187.5,528.54 v1(3187.5,446.5)
  Mid-Layer 2 w7: ZIF1.127@2537.5,3037.5 2537.5,3007.5 2577,2968 2577,1833 2573,1829 2573,1497 2608,1462 2896,1462 2906,1472 2906,1553 2960,1607 3098,1607 3123,1582 v1(3123,610.5)
  Bottom Layer w7: v1(1395,186) 2927,186 v1(3187.5,446.5)
INSIDE_B127: ETH1_U_TOP_HEADER_WRP1.25 VT1_U_VT_WRP1.IVCC7 ZIF1.128 | length 5019.7
  Top Layer w7: v1(1304,160) 1304.43,160.43 VT1_U_VT_WRP1.IVCC7@1341.14,160.43 ; ZIF1.128@2937.5,3037.5 2977,2998 3152,2998 3197,2953 3197,2317 3216,2298 3256,2298 3277,2277 3277,2017 3317,1977 3317,737.5 3272,692.5 3272,664.5 3287.5,649 ETH1_U_TOP_HEADER_WRP1.25@3287.5,528.54 v1(3287.5,479)
  Bottom Layer w7: v1(1304,160) 2968.5,160 v1(3287.5,479)
INTERNAL0_U_COMBINED_HEADER_WRP1: ETH1_U_BOTTOM_HEADER_WRP1.1 ETH1_U_TOP_HEADER_WRP2.1 | length 193.3
  Top Layer w7: ETH1_U_TOP_HEADER_WRP2.1@1787.5,1221.46 1787.5,1078.5 v1(1788,1078)
  Bottom Layer w7: ETH1_U_BOTTOM_HEADER_WRP1.1@1787.5,1028.54 1787.5,1077.5 v1(1788,1078)
INTERNAL0_U_COMBINED_HEADER_WRP2: ETH1_U_BOTTOM_HEADER_WRP2.1 ETH1_U_TOP_HEADER_WRP4.1 | length 960.4
  Top Layer w7: v1(3905.5,3738) 3905.5,3687.5 ETH1_U_TOP_HEADER_WRP4.1@3946.46,3687.5
  Bottom Layer w7: v1(3905.5,3738) 4653.5,3738 4704,3687.5 ETH1_U_BOTTOM_HEADER_WRP2.1@4753.54,3687.5
INTERNAL0_U_COMBINED_HEADER_WRP3: ETH1_U_BOTTOM_HEADER_WRP3.1 ETH1_U_TOP_HEADER_WRP6.1 | length 940.2
  Top Layer w7: ETH1_U_TOP_HEADER_WRP6.1@1528.54,1787.5 1577.5,1787.5 v1(1535,1745)
  Mid-Layer 1 w7: v1(956,1787.5) 998.5,1745 v1(1535,1745)
  Bottom Layer w7: ETH1_U_BOTTOM_HEADER_WRP3.1@721.46,1787.5 v1(956,1787.5)
INTERNAL0_U_COMBINED_HEADER_WRP4: ETH1_U_BOTTOM_HEADER_WRP4.1 ETH1_U_TOP_HEADER_WRP8.1 | length 193.3
  Top Layer w7: ETH1_U_TOP_HEADER_WRP8.1@1787.5,4946.46 1787.5,4803.5 v1(1788,4803)
  Bottom Layer w7: ETH1_U_BOTTOM_HEADER_WRP4.1@1787.5,4753.54 1787.5,4802.5 v1(1788,4803)
INTERNAL1_U_COMBINED_HEADER_WRP1: ETH1_U_BOTTOM_HEADER_WRP1.2 ETH1_U_TOP_HEADER_WRP2.2 | length 292
  Top Layer w7: v1(1887.5,979) ETH1_U_TOP_HEADER_WRP2.2@1887.5,1221.46
  Bottom Layer w7: v1(1887.5,979) ETH1_U_BOTTOM_HEADER_WRP1.2@1887.5,1028.54
INTERNAL1_U_COMBINED_HEADER_WRP2: ETH1_U_BOTTOM_HEADER_WRP2.2 ETH1_U_TOP_HEADER_WRP4.2 | length 918.8
  Top Layer w7: ETH1_U_TOP_HEADER_WRP4.2@3946.46,3587.5 v1(4123,3587.5)
  Mid-Layer 1 w7: v1(4123,3587.5) 4138.5,3603 4788,3603 v1(4803,3588)
  Bottom Layer w7: ETH1_U_BOTTOM_HEADER_WRP2.2@4753.54,3587.5 4802.5,3587.5 v1(4803,3588)
INTERNAL1_U_COMBINED_HEADER_WRP3: ETH1_U_BOTTOM_HEADER_WRP3.2 ETH1_U_TOP_HEADER_WRP6.2 | length 828.2
  Top Layer w7: v1(1454,1913) 1479.5,1887.5 ETH1_U_TOP_HEADER_WRP6.2@1528.54,1887.5
  Mid-Layer 1 w7: v1(835,1887.5) 860.5,1913 v1(1454,1913)
  Bottom Layer w7: ETH1_U_BOTTOM_HEADER_WRP3.2@721.46,1887.5 v1(835,1887.5)
INTERNAL1_U_COMBINED_HEADER_WRP4: ETH1_U_BOTTOM_HEADER_WRP4.2 ETH1_U_TOP_HEADER_WRP8.2 | length 292
  Top Layer w7: v1(1887.5,4704) ETH1_U_TOP_HEADER_WRP8.2@1887.5,4946.46
  Bottom Layer w7: v1(1887.5,4704) ETH1_U_BOTTOM_HEADER_WRP4.2@1887.5,4753.54
INTERNAL2_U_COMBINED_HEADER_WRP1: ETH1_U_BOTTOM_HEADER_WRP1.3 ETH1_U_TOP_HEADER_WRP2.3 | length 193.3
  Top Layer w7: ETH1_U_TOP_HEADER_WRP2.3@1987.5,1221.46 1987.5,1078.5 v1(1988,1078)
  Bottom Layer w7: ETH1_U_BOTTOM_HEADER_WRP1.3@1987.5,1028.54 1987.5,1077.5 v1(1988,1078)
INTERNAL2_U_COMBINED_HEADER_WRP2: ETH1_U_BOTTOM_HEADER_WRP2.3 ETH1_U_TOP_HEADER_WRP4.3 | length 932.1
  Top Layer w7: v1(3897,3488) 3897.5,3487.5 ETH1_U_TOP_HEADER_WRP4.3@3946.46,3487.5
  Mid-Layer 1 w7: v1(3897,3488) 3928,3519 v1(4673,3519)
  Bottom Layer w7: v1(4673,3519) 4704.5,3487.5 ETH1_U_BOTTOM_HEADER_WRP2.3@4753.54,3487.5
INTERNAL2_U_COMBINED_HEADER_WRP3: ETH1_U_BOTTOM_HEADER_WRP3.3 ETH1_U_TOP_HEADER_WRP6.3 | length 947.8
  Top Layer w7: ETH1_U_TOP_HEADER_WRP6.3@1528.54,1987.5 1577.5,1987.5 v1(1578,1988)
  Mid-Layer 1 w7: v1(821.5,2038) 1528,2038 v1(1578,1988)
  Bottom Layer w7: ETH1_U_BOTTOM_HEADER_WRP3.3@721.46,1987.5 771,1987.5 v1(821.5,2038)
INTERNAL2_U_COMBINED_HEADER_WRP4: ETH1_U_BOTTOM_HEADER_WRP4.3 ETH1_U_TOP_HEADER_WRP8.3 | length 193.3
  Top Layer w7: ETH1_U_TOP_HEADER_WRP8.3@1987.5,4946.46 1987.5,4803.5 v1(1988,4803)
  Bottom Layer w7: ETH1_U_BOTTOM_HEADER_WRP4.3@1987.5,4753.54 1987.5,4802.5 v1(1988,4803)
INTERNAL3_U_COMBINED_HEADER_WRP1: ETH1_U_BOTTOM_HEADER_WRP1.4 ETH1_U_TOP_HEADER_WRP2.4 | length 192.9
  Top Layer w7: v1(2087.5,1129) ETH1_U_TOP_HEADER_WRP2.4@2087.5,1221.46
  Bottom Layer w7: ETH1_U_BOTTOM_HEADER_WRP1.4@2087.5,1028.54 v1(2087.5,1129)
INTERNAL3_U_COMBINED_HEADER_WRP2: ETH1_U_BOTTOM_HEADER_WRP2.4 ETH1_U_TOP_HEADER_WRP4.4 | length 927.1
  Top Layer w7: ETH1_U_TOP_HEADER_WRP4.4@3946.46,3387.5 3996,3387.5 v1(4021.5,3413)
  Mid-Layer 1 w7: v1(4021.5,3413) 4778,3413 v1(4803,3388)
  Bottom Layer w7: ETH1_U_BOTTOM_HEADER_WRP2.4@4753.54,3387.5 4802.5,3387.5 v1(4803,3388)
INTERNAL3_U_COMBINED_HEADER_WRP3: ETH1_U_BOTTOM_HEADER_WRP3.4 ETH1_U_TOP_HEADER_WRP6.4 | length 923.8
  Top Layer w7: v1(1466,2109) 1487.5,2087.5 ETH1_U_TOP_HEADER_WRP6.4@1528.54,2087.5
  Mid-Layer 1 w7: v1(672,2088) 693,2109 v1(1466,2109)
  Bottom Layer w7: v1(672,2088) 672.5,2087.5 ETH1_U_BOTTOM_HEADER_WRP3.4@721.46,2087.5
INTERNAL3_U_COMBINED_HEADER_WRP4: ETH1_U_BOTTOM_HEADER_WRP4.4 ETH1_U_TOP_HEADER_WRP8.4 | length 292
  Top Layer w7: v1(2087.5,4704) ETH1_U_TOP_HEADER_WRP8.4@2087.5,4946.46
  Bottom Layer w7: v1(2087.5,4704) ETH1_U_BOTTOM_HEADER_WRP4.4@2087.5,4753.54
INTERNAL4_U_COMBINED_HEADER_WRP1: ETH1_U_BOTTOM_HEADER_WRP1.5 ETH1_U_TOP_HEADER_WRP2.5 | length 193.3
  Top Layer w7: ETH1_U_TOP_HEADER_WRP2.5@2187.5,1221.46 2187.5,1078.5 v1(2188,1078)
  Bottom Layer w7: ETH1_U_BOTTOM_HEADER_WRP1.5@2187.5,1028.54 2187.5,1077.5 v1(2188,1078)
INTERNAL4_U_COMBINED_HEADER_WRP2: ETH1_U_BOTTOM_HEADER_WRP2.5 ETH1_U_TOP_HEADER_WRP4.5 | length 923.4
  Top Layer w7: v1(3897,3288) 3897.5,3287.5 ETH1_U_TOP_HEADER_WRP4.5@3946.46,3287.5
  Mid-Layer 1 w7: v1(3897,3288) 3918,3267 v1(4691.5,3267)
  Bottom Layer w7: v1(4691.5,3267) 4712,3287.5 ETH1_U_BOTTOM_HEADER_WRP2.5@4753.54,3287.5
INTERNAL4_U_COMBINED_HEADER_WRP3: ETH1_U_BOTTOM_HEADER_WRP3.5 ETH1_U_TOP_HEADER_WRP6.5 | length 946
  Top Layer w7: v1(1528,2138) 1577.5,2187.5 ETH1_U_TOP_HEADER_WRP6.5@1528.54,2187.5
  Mid-Layer 1 w7: v1(772,2187.5) 821.5,2138 v1(1528,2138)
  Bottom Layer w7: ETH1_U_BOTTOM_HEADER_WRP3.5@721.46,2187.5 v1(772,2187.5)
INTERNAL4_U_COMBINED_HEADER_WRP4: ETH1_U_BOTTOM_HEADER_WRP4.5 ETH1_U_TOP_HEADER_WRP8.5 | length 193.3
  Top Layer w7: ETH1_U_TOP_HEADER_WRP8.5@2187.5,4946.46 2187.5,4803.5 v1(2188,4803)
  Bottom Layer w7: ETH1_U_BOTTOM_HEADER_WRP4.5@2187.5,4753.54 2187.5,4802.5 v1(2188,4803)
INTERNAL5_U_COMBINED_HEADER_WRP1: ETH1_U_BOTTOM_HEADER_WRP1.6 ETH1_U_TOP_HEADER_WRP2.6 | length 292
  Top Layer w7: v1(2287.5,979) ETH1_U_TOP_HEADER_WRP2.6@2287.5,1221.46
  Bottom Layer w7: v1(2287.5,979) ETH1_U_BOTTOM_HEADER_WRP1.6@2287.5,1028.54
INTERNAL5_U_COMBINED_HEADER_WRP2: ETH1_U_BOTTOM_HEADER_WRP2.6 ETH1_U_TOP_HEADER_WRP4.6 | length 947.8
  Top Layer w7: ETH1_U_TOP_HEADER_WRP4.6@3946.46,3187.5 3996,3187.5 v1(4046.5,3238)
  Mid-Layer 1 w7: v1(4046.5,3238) 4753,3238 v1(4803,3188)
  Bottom Layer w7: ETH1_U_BOTTOM_HEADER_WRP2.6@4753.54,3187.5 4802.5,3187.5 v1(4803,3188)
INTERNAL5_U_COMBINED_HEADER_WRP3: ETH1_U_BOTTOM_HEADER_WRP3.6 ETH1_U_TOP_HEADER_WRP6.6 | length 828.3
  Top Layer w7: v1(1479,2306) 1479,2296 1487.5,2287.5 ETH1_U_TOP_HEADER_WRP6.6@1528.54,2287.5
  Mid-Layer 1 w7: v1(790,2287.5) 808.5,2306 v1(1479,2306)
  Bottom Layer w7: ETH1_U_BOTTOM_HEADER_WRP3.6@721.46,2287.5 v1(790,2287.5)
INTERNAL5_U_COMBINED_HEADER_WRP4: ETH1_U_BOTTOM_HEADER_WRP4.6 ETH1_U_TOP_HEADER_WRP8.6 | length 292
  Top Layer w7: v1(2287.5,4704) ETH1_U_TOP_HEADER_WRP8.6@2287.5,4946.46
  Bottom Layer w7: v1(2287.5,4704) ETH1_U_BOTTOM_HEADER_WRP4.6@2287.5,4753.54
INTERNAL6_U_COMBINED_HEADER_WRP1: ETH1_U_BOTTOM_HEADER_WRP1.7 ETH1_U_TOP_HEADER_WRP2.7 | length 193.3
  Top Layer w7: ETH1_U_TOP_HEADER_WRP2.7@2387.5,1221.46 2387.5,1078.5 v1(2388,1078)
  Bottom Layer w7: ETH1_U_BOTTOM_HEADER_WRP1.7@2387.5,1028.54 2387.5,1077.5 v1(2388,1078)
INTERNAL6_U_COMBINED_HEADER_WRP2: ETH1_U_BOTTOM_HEADER_WRP2.7 ETH1_U_TOP_HEADER_WRP4.7 | length 819.9
  Top Layer w7: ETH1_U_TOP_HEADER_WRP4.7@3946.46,3087.5 v1(4122,3087.5)
  Mid-Layer 1 w7: v1(4122,3087.5) 4137.5,3072 v1(4696.5,3072)
  Bottom Layer w7: v1(4696.5,3072) 4712,3087.5 ETH1_U_BOTTOM_HEADER_WRP2.7@4753.54,3087.5
INTERNAL6_U_COMBINED_HEADER_WRP3: ETH1_U_BOTTOM_HEADER_WRP3.7 ETH1_U_TOP_HEADER_WRP6.7 | length 928.8
  Top Layer w7: v1(808.5,2425) 1550.5,2425 1568,2407.5 1568,2387.5 ETH1_U_TOP_HEADER_WRP6.7@1528.54,2387.5
  Bottom Layer w7: ETH1_U_BOTTOM_HEADER_WRP3.7@721.46,2387.5 771,2387.5 v1(808.5,2425)
INTERNAL6_U_COMBINED_HEADER_WRP4: ETH1_U_BOTTOM_HEADER_WRP4.7 ETH1_U_TOP_HEADER_WRP8.7 | length 193.3
  Top Layer w7: ETH1_U_TOP_HEADER_WRP8.7@2387.5,4946.46 2387.5,4803.5 v1(2388,4803)
  Bottom Layer w7: ETH1_U_BOTTOM_HEADER_WRP4.7@2387.5,4753.54 2387.5,4802.5 v1(2388,4803)
INTERNAL7_U_COMBINED_HEADER_WRP1: ETH1_U_BOTTOM_HEADER_WRP1.8 ETH1_U_TOP_HEADER_WRP2.8 | length 192.9
  Top Layer w7: v1(2487.5,1128) ETH1_U_TOP_HEADER_WRP2.8@2487.5,1221.46
  Bottom Layer w7: ETH1_U_BOTTOM_HEADER_WRP1.8@2487.5,1028.54 v1(2487.5,1128)
INTERNAL7_U_COMBINED_HEADER_WRP2: ETH1_U_BOTTOM_HEADER_WRP2.8 ETH1_U_TOP_HEADER_WRP4.8 | length 950.5
  Top Layer w7: ETH1_U_TOP_HEADER_WRP4.8@3946.46,2987.5 3996,2987.5 v1(4027.5,2956)
  Mid-Layer 1 w7: v1(4027.5,2956) v1(4803,2956)
  Bottom Layer w7: ETH1_U_BOTTOM_HEADER_WRP2.8@4753.54,2987.5 4803,2987.5 v1(4803,2956)
INTERNAL7_U_COMBINED_HEADER_WRP3: ETH1_U_BOTTOM_HEADER_WRP3.8 ETH1_U_TOP_HEADER_WRP6.8 | length 823.2
  Top Layer w7: v1(1460,2468) 1479.5,2487.5 ETH1_U_TOP_HEADER_WRP6.8@1528.54,2487.5
  Mid-Layer 1 w7: v1(818,2487.5) 837.5,2468 v1(1460,2468)
  Bottom Layer w7: ETH1_U_BOTTOM_HEADER_WRP3.8@721.46,2487.5 v1(818,2487.5)
INTERNAL7_U_COMBINED_HEADER_WRP4: ETH1_U_BOTTOM_HEADER_WRP4.8 ETH1_U_TOP_HEADER_WRP8.8 | length 292
  Top Layer w7: v1(2487.5,4704) ETH1_U_TOP_HEADER_WRP8.8@2487.5,4946.46
  Bottom Layer w7: v1(2487.5,4704) ETH1_U_BOTTOM_HEADER_WRP4.8@2487.5,4753.54
INTERNAL8_U_COMBINED_HEADER_WRP1: ETH1_U_BOTTOM_HEADER_WRP1.9 ETH1_U_TOP_HEADER_WRP2.9 | length 193.3
  Top Layer w7: ETH1_U_TOP_HEADER_WRP2.9@2587.5,1221.46 2587.5,1078.5 v1(2588,1078)
  Bottom Layer w7: ETH1_U_BOTTOM_HEADER_WRP1.9@2587.5,1028.54 2587.5,1077.5 v1(2588,1078)
INTERNAL8_U_COMBINED_HEADER_WRP2: ETH1_U_BOTTOM_HEADER_WRP2.9 ETH1_U_TOP_HEADER_WRP4.9 | length 832.4
  Top Layer w7: ETH1_U_TOP_HEADER_WRP4.9@3946.46,2887.5 4087.5,2887.5 v1(4118,2918)
  Mid-Layer 1 w7: v1(4118,2918) v1(4681.5,2918)
  Bottom Layer w7: v1(4681.5,2918) 4712,2887.5 ETH1_U_BOTTOM_HEADER_WRP2.9@4753.54,2887.5
INTERNAL8_U_COMBINED_HEADER_WRP3: ETH1_U_BOTTOM_HEADER_WRP3.9 ETH1_U_TOP_HEADER_WRP6.9 | length 922.1
  Top Layer w7: ETH1_U_TOP_HEADER_WRP6.9@1528.54,2587.5 1568,2587.5 1578,2577.5 v1(1578,2572)
  Mid-Layer 1 w7: v1(771,2587.5) 786.5,2572 v1(1578,2572)
  Bottom Layer w7: ETH1_U_BOTTOM_HEADER_WRP3.9@721.46,2587.5 v1(771,2587.5)
INTERNAL8_U_COMBINED_HEADER_WRP4: ETH1_U_BOTTOM_HEADER_WRP4.9 ETH1_U_TOP_HEADER_WRP8.9 | length 193.3
  Top Layer w7: ETH1_U_TOP_HEADER_WRP8.9@2587.5,4946.46 2587.5,4803.5 v1(2588,4803)
  Bottom Layer w7: ETH1_U_BOTTOM_HEADER_WRP4.9@2587.5,4753.54 2587.5,4802.5 v1(2588,4803)
INTERNAL9_U_COMBINED_HEADER_WRP1: ETH1_U_BOTTOM_HEADER_WRP1.10 ETH1_U_TOP_HEADER_WRP2.10 | length 292
  Top Layer w7: v1(2687.5,979) ETH1_U_TOP_HEADER_WRP2.10@2687.5,1221.46
  Bottom Layer w7: v1(2687.5,979) ETH1_U_BOTTOM_HEADER_WRP1.10@2687.5,1028.54
INTERNAL9_U_COMBINED_HEADER_WRP2: ETH1_U_BOTTOM_HEADER_WRP2.10 ETH1_U_TOP_HEADER_WRP4.10 | length 906.4
  Top Layer w7: ETH1_U_TOP_HEADER_WRP4.10@3946.46,2787.5 3996,2787.5 v1(3996.5,2788)
  Mid-Layer 1 w7: v1(3996.5,2788) v1(4803,2788)
  Bottom Layer w7: ETH1_U_BOTTOM_HEADER_WRP2.10@4753.54,2787.5 4802.5,2787.5 v1(4803,2788)
INTERNAL9_U_COMBINED_HEADER_WRP3: ETH1_U_BOTTOM_HEADER_WRP3.10 ETH1_U_TOP_HEADER_WRP6.10 | length 834
  Top Layer w7: v1(1447,2655) 1479.5,2687.5 ETH1_U_TOP_HEADER_WRP6.10@1528.54,2687.5
  Mid-Layer 1 w7: v1(870,2687.5) 902.5,2655 v1(1447,2655)
  Bottom Layer w7: ETH1_U_BOTTOM_HEADER_WRP3.10@721.46,2687.5 v1(870,2687.5)
INTERNAL9_U_COMBINED_HEADER_WRP4: ETH1_U_BOTTOM_HEADER_WRP4.10 ETH1_U_TOP_HEADER_WRP8.10 | length 292
  Top Layer w7: v1(2687.5,4704) ETH1_U_TOP_HEADER_WRP8.10@2687.5,4946.46
  Bottom Layer w7: v1(2687.5,4704) ETH1_U_BOTTOM_HEADER_WRP4.10@2687.5,4753.54
INTERNAL10_U_COMBINED_HEADER_WRP1: ETH1_U_BOTTOM_HEADER_WRP1.11 ETH1_U_TOP_HEADER_WRP2.11 | length 192.9
  Top Layer w7: v1(2787.5,1077.5) ETH1_U_TOP_HEADER_WRP2.11@2787.5,1221.46
  Bottom Layer w7: ETH1_U_BOTTOM_HEADER_WRP1.11@2787.5,1028.54 v1(2787.5,1077.5)
INTERNAL10_U_COMBINED_HEADER_WRP2: ETH1_U_BOTTOM_HEADER_WRP2.11 ETH1_U_TOP_HEADER_WRP4.11 | length 846.4
  Top Layer w7: ETH1_U_TOP_HEADER_WRP4.11@3946.46,2687.5 4133,2687.5 v1(4180.5,2640)
  Bottom Layer w7: v1(4180.5,2640) 4664.5,2640 4712,2687.5 ETH1_U_BOTTOM_HEADER_WRP2.11@4753.54,2687.5
INTERNAL10_U_COMBINED_HEADER_WRP3: ETH1_U_BOTTOM_HEADER_WRP3.11 ETH1_U_TOP_HEADER_WRP6.11 | length 944.3
  Top Layer w7: ETH1_U_TOP_HEADER_WRP6.11@1528.54,2787.5 1577.5,2787.5 v1(1578,2788)
  Mid-Layer 1 w7: v1(775.25,2787.5) 821.5,2833.75 1532.25,2833.75 v1(1578,2788)
  Bottom Layer w7: ETH1_U_BOTTOM_HEADER_WRP3.11@721.46,2787.5 v1(775.25,2787.5)
INTERNAL10_U_COMBINED_HEADER_WRP4: ETH1_U_BOTTOM_HEADER_WRP4.11 ETH1_U_TOP_HEADER_WRP8.11 | length 193.3
  Top Layer w7: ETH1_U_TOP_HEADER_WRP8.11@2787.5,4946.46 2787.5,4803.5 v1(2788,4803)
  Bottom Layer w7: ETH1_U_BOTTOM_HEADER_WRP4.11@2787.5,4753.54 2787.5,4802.5 v1(2788,4803)
INTERNAL11_U_COMBINED_HEADER_WRP1: ETH1_U_BOTTOM_HEADER_WRP1.12 ETH1_U_TOP_HEADER_WRP2.12 | length 292
  Top Layer w7: v1(2887.5,979) ETH1_U_TOP_HEADER_WRP2.12@2887.5,1221.46
  Bottom Layer w7: v1(2887.5,979) ETH1_U_BOTTOM_HEADER_WRP1.12@2887.5,1028.54
INTERNAL11_U_COMBINED_HEADER_WRP2: ETH1_U_BOTTOM_HEADER_WRP2.12 ETH1_U_TOP_HEADER_WRP4.12 | length 925.1
  Top Layer w7: ETH1_U_TOP_HEADER_WRP4.12@3946.46,2587.5 v1(3996,2587.5)
  Mid-Layer 1 w7: v1(3996,2587.5) 4018.5,2610 4780,2610 v1(4803,2587)
  Bottom Layer w7: ETH1_U_BOTTOM_HEADER_WRP2.12@4753.54,2587.5 4802.5,2587.5 v1(4803,2587)
INTERNAL11_U_COMBINED_HEADER_WRP3: ETH1_U_BOTTOM_HEADER_WRP3.12 ETH1_U_TOP_HEADER_WRP6.12 | length 906.4
  Top Layer w7: v1(1479,2888) 1479.5,2887.5 ETH1_U_TOP_HEADER_WRP6.12@1528.54,2887.5
  Mid-Layer 1 w7: v1(672,2888) v1(1479,2888)
  Bottom Layer w7: v1(672,2888) 672.5,2887.5 ETH1_U_BOTTOM_HEADER_WRP3.12@721.46,2887.5
INTERNAL11_U_COMBINED_HEADER_WRP4: ETH1_U_BOTTOM_HEADER_WRP4.12 ETH1_U_TOP_HEADER_WRP8.12 | length 292
  Top Layer w7: v1(2887.5,4704) ETH1_U_TOP_HEADER_WRP8.12@2887.5,4946.46
  Bottom Layer w7: v1(2887.5,4704) ETH1_U_BOTTOM_HEADER_WRP4.12@2887.5,4753.54